# EAGLE board USB_Board (EAGLE 6.5.0)
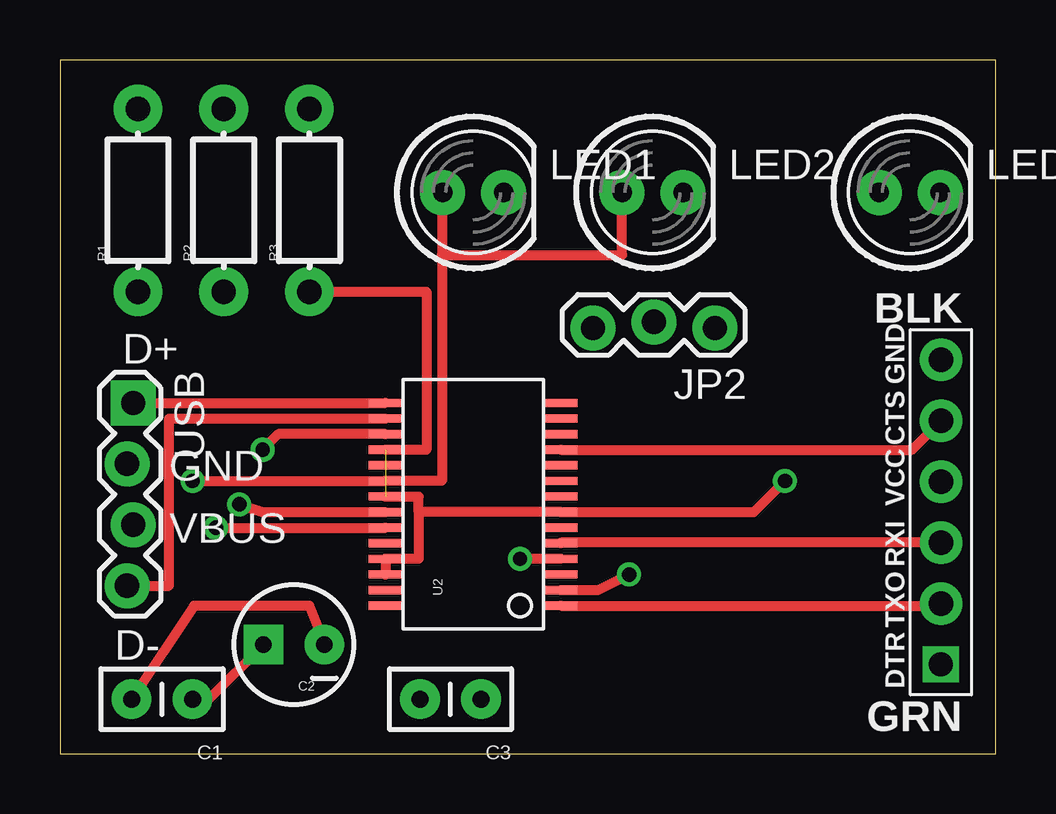
[diagram p0: board, top side]
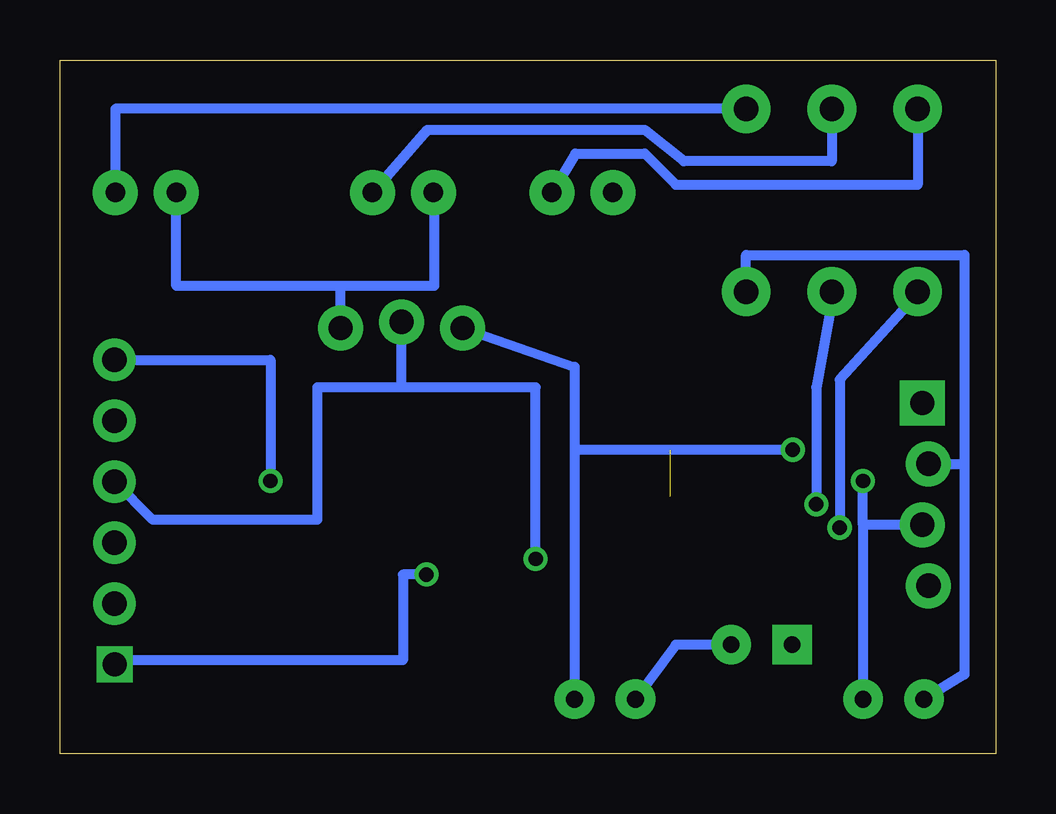
[diagram p1: board, bottom side, seen from below]

Size 39 x 28.93 mm. Coordinates in mm from the lower left corner, seen from the top.
Outline: 0,0 39,0 39,28.93 0,28.93 0,0
Copper layers (1*16): Top 0.035mm / dielectric 1.5mm / Bottom 0.035mm
Design rules "default": minimum track width 10mil, minimum drill 24mil, track to track 8mil, track to pad 8mil, pad to pad 8mil, via to via 8mil, smd to smd 8mil, copper to edge 40mil, drill to drill 8mil, minimum pad ring 10mil, minimum via ring 8mil, stop-mask expansion 4mil, vias tented up to drill 0mil, thermal gap 10mil

## Footprints (pad centres in the part's own frame; a part is rotated, then mirrored left to right if it is on the bottom)
CAP-PTH-SMALLEZ = drill 0.7 pad 1.651: 1 0,0; 2 2.54,0
CPOL-RADIAL-10UF-25V = drill 0.7 pad 1.651 square: 1 1.27,0 | drill 0.7 pad 1.651: 2 -1.27,0
FTDI_DEVICE_SIDE = drill 1 square: P$1 -6.35,0 | drill 1.016 pad 1.778: P$2 -3.81,0; P$3 -1.27,0; P$4 1.27,0; P$5 3.81,0; P$6 6.35,0
1X03_LOCK = drill 1.016 pad 1.88: 1 0,0.127; 2 2.54,-0.127; 3 5.08,0.127
LED5MM = drill 0.813 pad 1.88: A -1.27,0; K 1.27,0
AXIAL-0.3-KIT = drill 1.016 pad 2.032: P$1 -3.81,0; P$2 3.81,0
SSOP28DB = smd 0.348 x 1.397: 1 -4.225,-3.656; 2 -3.575,-3.656; 3 -2.925,-3.656; 4 -2.275,-3.656; 5 -1.625,-3.656; 6 -0.975,-3.656; 7 -0.325,-3.656; 8 0.325,-3.656; 9 0.975,-3.656; 10 1.625,-3.656; 11 2.275,-3.656; 12 2.925,-3.656; 13 3.575,-3.656; 14 4.225,-3.656; 15 4.225,3.656; 16 3.575,3.656; 17 2.925,3.656; 18 2.275,3.656; 19 1.625,3.656; 20 0.975,3.656; 21 0.325,3.656; 22 -0.325,3.656; 23 -0.975,3.656; 24 -1.625,3.656; 25 -2.275,3.656; 26 -2.925,3.656; 27 -3.575,3.656; 28 -4.225,3.656
1X04_LOCK = drill 1.016 pad 1.88 square: 1 0,0.127 | drill 1.016 pad 1.88: 2 2.54,-0.127; 3 5.08,0.127; 4 7.62,-0.127

## Placement (x,y rotation side)
C1  0.1uF  [CAP-PTH-SMALLEZ]  5.53,2.27 180 top
C2  10uF  [CPOL-RADIAL-10UF-25V]  9.75,4.55 180 top
C3  0.1uF  [CAP-PTH-SMALLEZ]  17.55,2.27 180 top
JP1  FTDI_DEVICE  [FTDI_DEVICE_SIDE]  36.73,10.07 90 top
JP2  [1X03_LOCK]  27.3,17.88 180 top
LED1  [LED5MM]  17.23,23.4 0 top
LED2  [LED5MM]  24.7,23.4 0 top
LED3  [LED5MM]  35.42,23.4 0 top
R1  [AXIAL-0.3-KIT]  3.25,23.07 90 top
R2  [AXIAL-0.3-KIT]  6.83,23.07 90 top
R3  [AXIAL-0.3-KIT]  10.4,23.07 90 top
U2  FT232RLSSOP  [SSOP28DB]  17.23,10.4 90 top
USB  [1X04_LOCK]  2.92,14.62 270 top

## Library data of the parts
C1-C3 = SparkFun-Capacitors
JP1 JP2 USB = SparkFun-Connectors
LED1-LED3 = SparkFun-LED
R1-R3 = SparkFun-Resistors; PROD_ID: RES-08375
U2 = SparkFun-DigitalIC; PROD_ID: IC-00870

## Nets
3.3V: C3.1 JP2.3 U2.17
5V: C1.1 C2.1 JP2.1 LED1.A LED2.A LED3.A U2.20 USB.3
GND: C1.2 C2.2 C3.2 JP1.P$6 R3.P$1 U2.7 U2.18 U2.21 U2.25 U2.26 USB.2
N$2: U2.16 USB.4
N$3: U2.15 USB.1
N$7: JP1.P$2 U2.1
N$8: JP1.P$3 U2.5
N$9: JP1.P$5 U2.11
N$10: JP1.P$1 U2.2
N$11: JP1.P$4 JP2.2 U2.4
N$13: R1.P$1 U2.23
N$14: R2.P$1 U2.22
N$15: LED1.K R1.P$2
N$16: LED2.K R2.P$2
N$17: LED3.K R3.P$2

## Tracks (layer width: path | path; a pad name or v marks a point on that pad's centre or on a via)
3.3V  (via drill 0.6)
  Top 0.406: U2.17 9.1,13.32 v8.45,12.68
  Bottom 0.406: v8.45,12.68 17.55,12.68 | JP2.3 17.55,16.12 17.55,12.68 | 17.55,12.68 C3.1
5V  (via drill 0.6)
  Top 0.406: v5.53,11.38 U2.20 15.93,11.38 15.93,20.8 | LED1.A 15.93,23.4 15.93,20.8 | 15.93,20.8 23.43,20.8 LED2.A | C1.1 6.21,2.27 C2.1
  Bottom 0.406: USB.3 5.53,9.54 | 5.53,9.54 C1.1 | 5.53,9.54 v5.53,11.38 | LED2.A 23.4,23.4 23.4,19.5 27.3,19.5 | JP2.1 27.3,19.5 | 27.3,19.5 34.16,19.5 LED3.A
GND  (via drill 0.6)  (1 unrouted)
  Top 0.406: R3.P$1 15.28,19.27 15.28,12.68 U2.18 | 14.95,10.07 U2.7 28.93,10.07 v30.23,11.38 | 14.95,10.07 14.95,10.72 U2.21 | 14.95,10.07 14.95,8.12 U2.25 U2.26 | C2.2 11.05,4.55 10.4,6.17 5.58,6.17 C1.2
  Bottom 0.406: USB.2 1.3,12.09 | 1.3,12.09 1.3,3.31 C1.2 | R3.P$1 10.4,20.8 1.3,20.8 1.3,12.09 | C2.2 13.32,4.55 C3.2 | JP1.P$6 30.23,16.43 v30.23,11.38
N$2
  Top 0.406: USB.4 4.55,7 4.55,13.97 U2.16
N$3
  Top 0.406: USB.1 U2.15
N$7
  Top 0.406: U2.1 36.63,6.17 JP1.P$2
N$8
  Top 0.406: JP1.P$3 20.88,8.8 U2.5
N$9
  Top 0.406: U2.11 35.52,12.68 JP1.P$5
N$10  (via drill 0.6)
  Top 0.406: U2.2 22.43,6.83 v23.73,7.47
  Bottom 0.406: v23.73,7.47 24.7,7.47 24.7,3.9 36.73,3.9 JP1.P$1
N$11  (via drill 0.6)
  Top 0.406: U2.4 v19.18,8.12
  Bottom 0.406: v19.18,8.12 19.18,15.28 24.76,15.28 | 24.76,15.28 JP2.2 | 24.76,15.28 28.27,15.28 28.27,9.75 35.13,9.75 JP1.P$4
N$13  (via drill 0.6)
  Top 0.406: v6.5,9.43 U2.23
  Bottom 0.406: R1.P$1 3.25,19.18 6.5,15.6 v6.5,9.43
N$14  (via drill 0.6)
  Top 0.406: v7.47,10.4 8.45,10.07 U2.22
  Bottom 0.406: R2.P$1 6.83,18.85 7.47,15.28 v7.47,10.4
N$15
  Bottom 0.406: R1.P$2 3.25,23.73 13.32,23.73 14.62,25.02 17.52,25.02 LED1.K
N$16
  Bottom 0.406: LED2.K 23.7,26 14.62,26 13,24.7 6.83,24.7 R2.P$2
N$17
  Bottom 0.406: R3.P$2 36.7,26.89 LED3.K

## Text on the board
tNames: D+ | GND | VBUS | D-